# Altium PCB 1K5_Power_Factor_V0.PcbDoc (part 1 of 2)
Units mm, origin at the board's own origin, x right, y up, seen from the top; angles counter-clockwise.
Board outline 100 x 100.08 mm, 2 copper layers (Top Layer, Bottom Layer); 98 components, 49 nets, 261 pads, 152 vias.
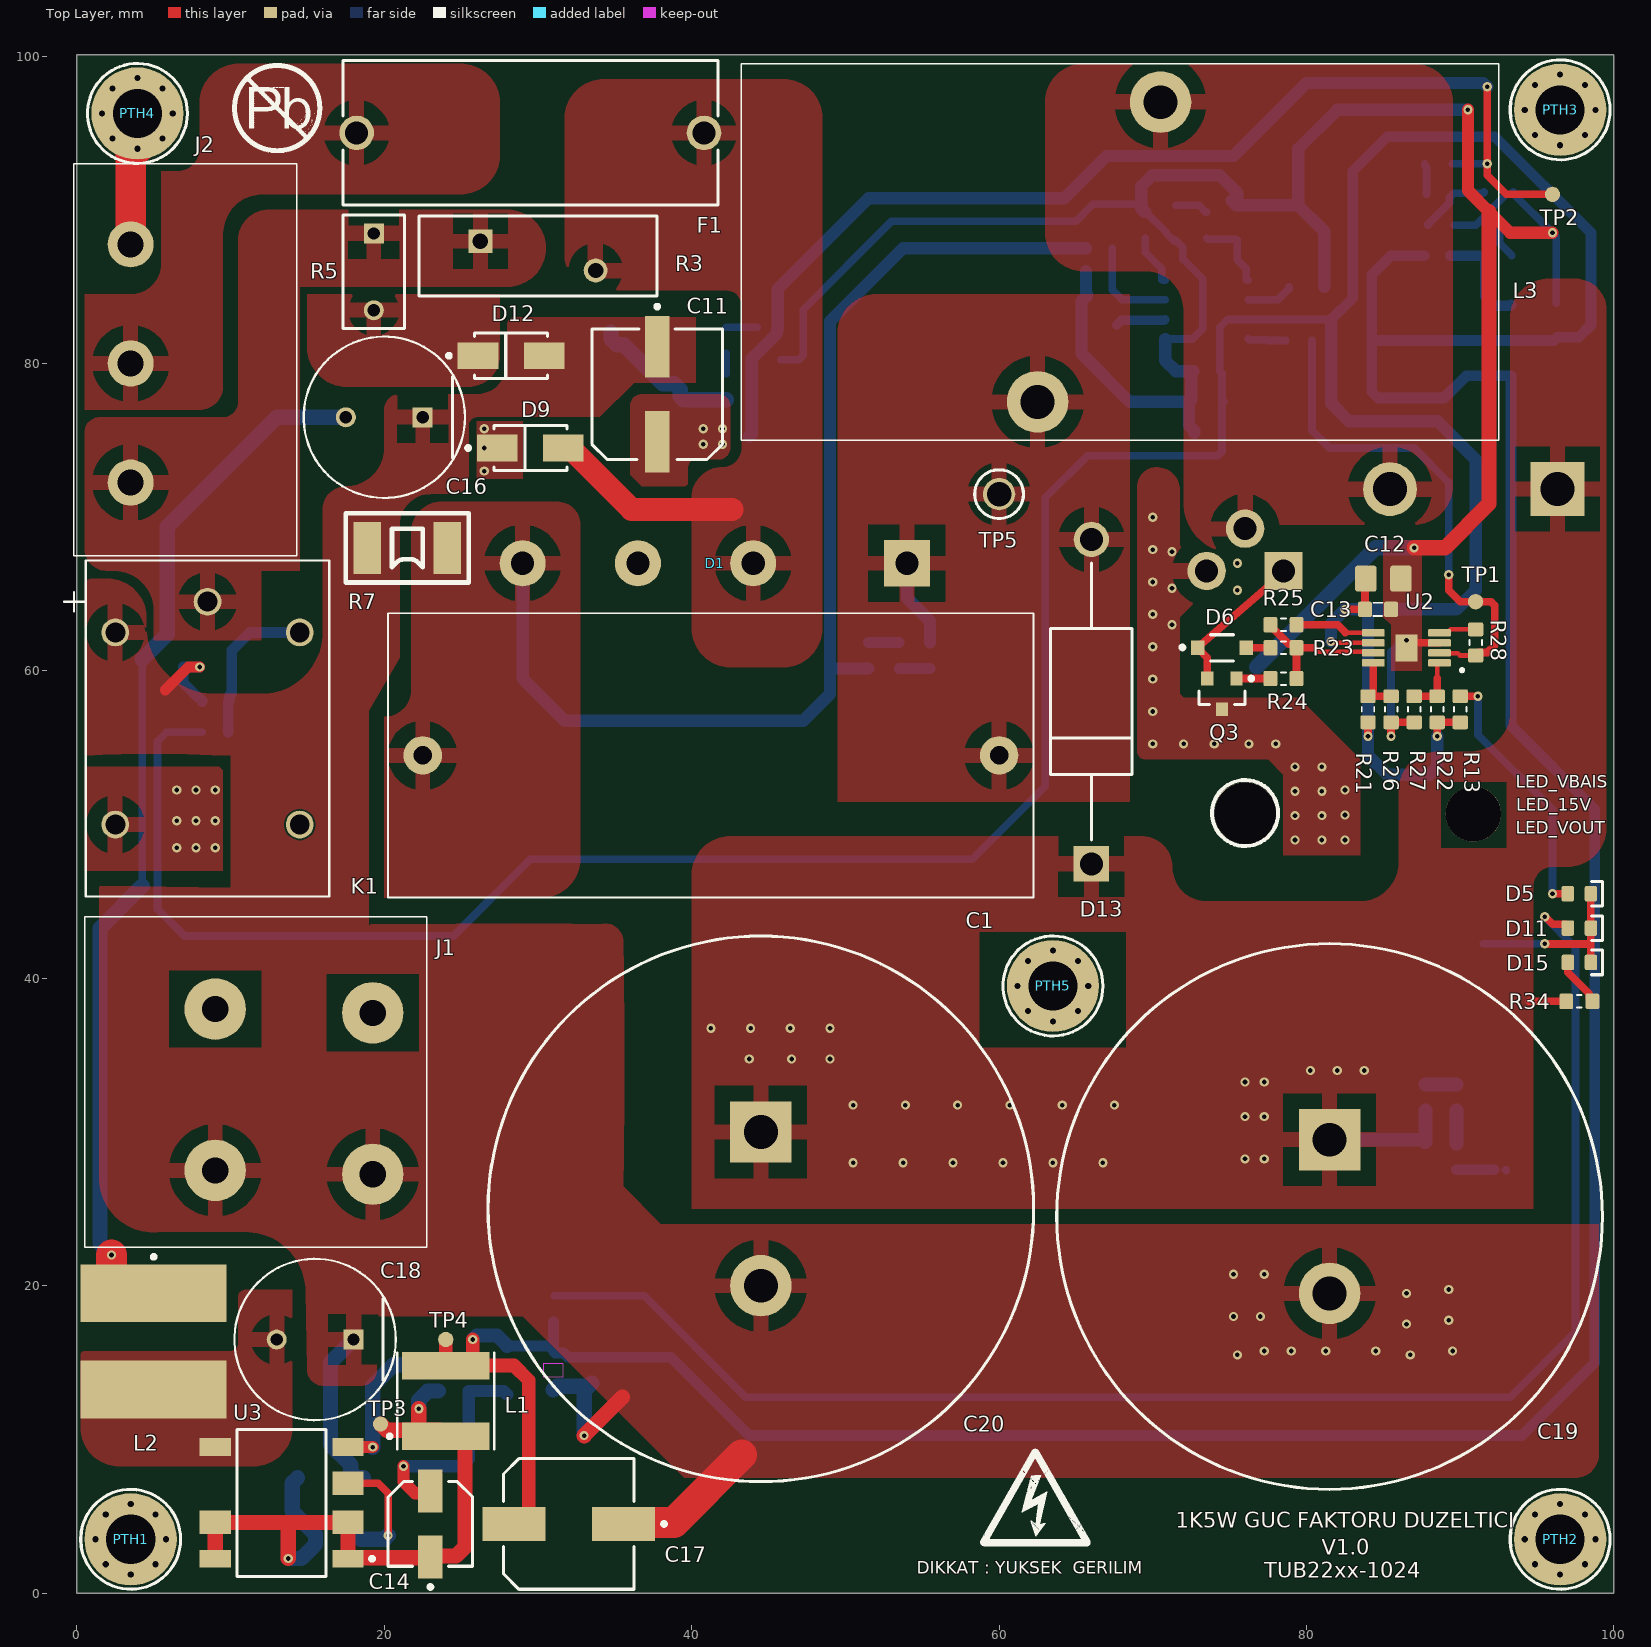
[diagram p0: Top Layer view]
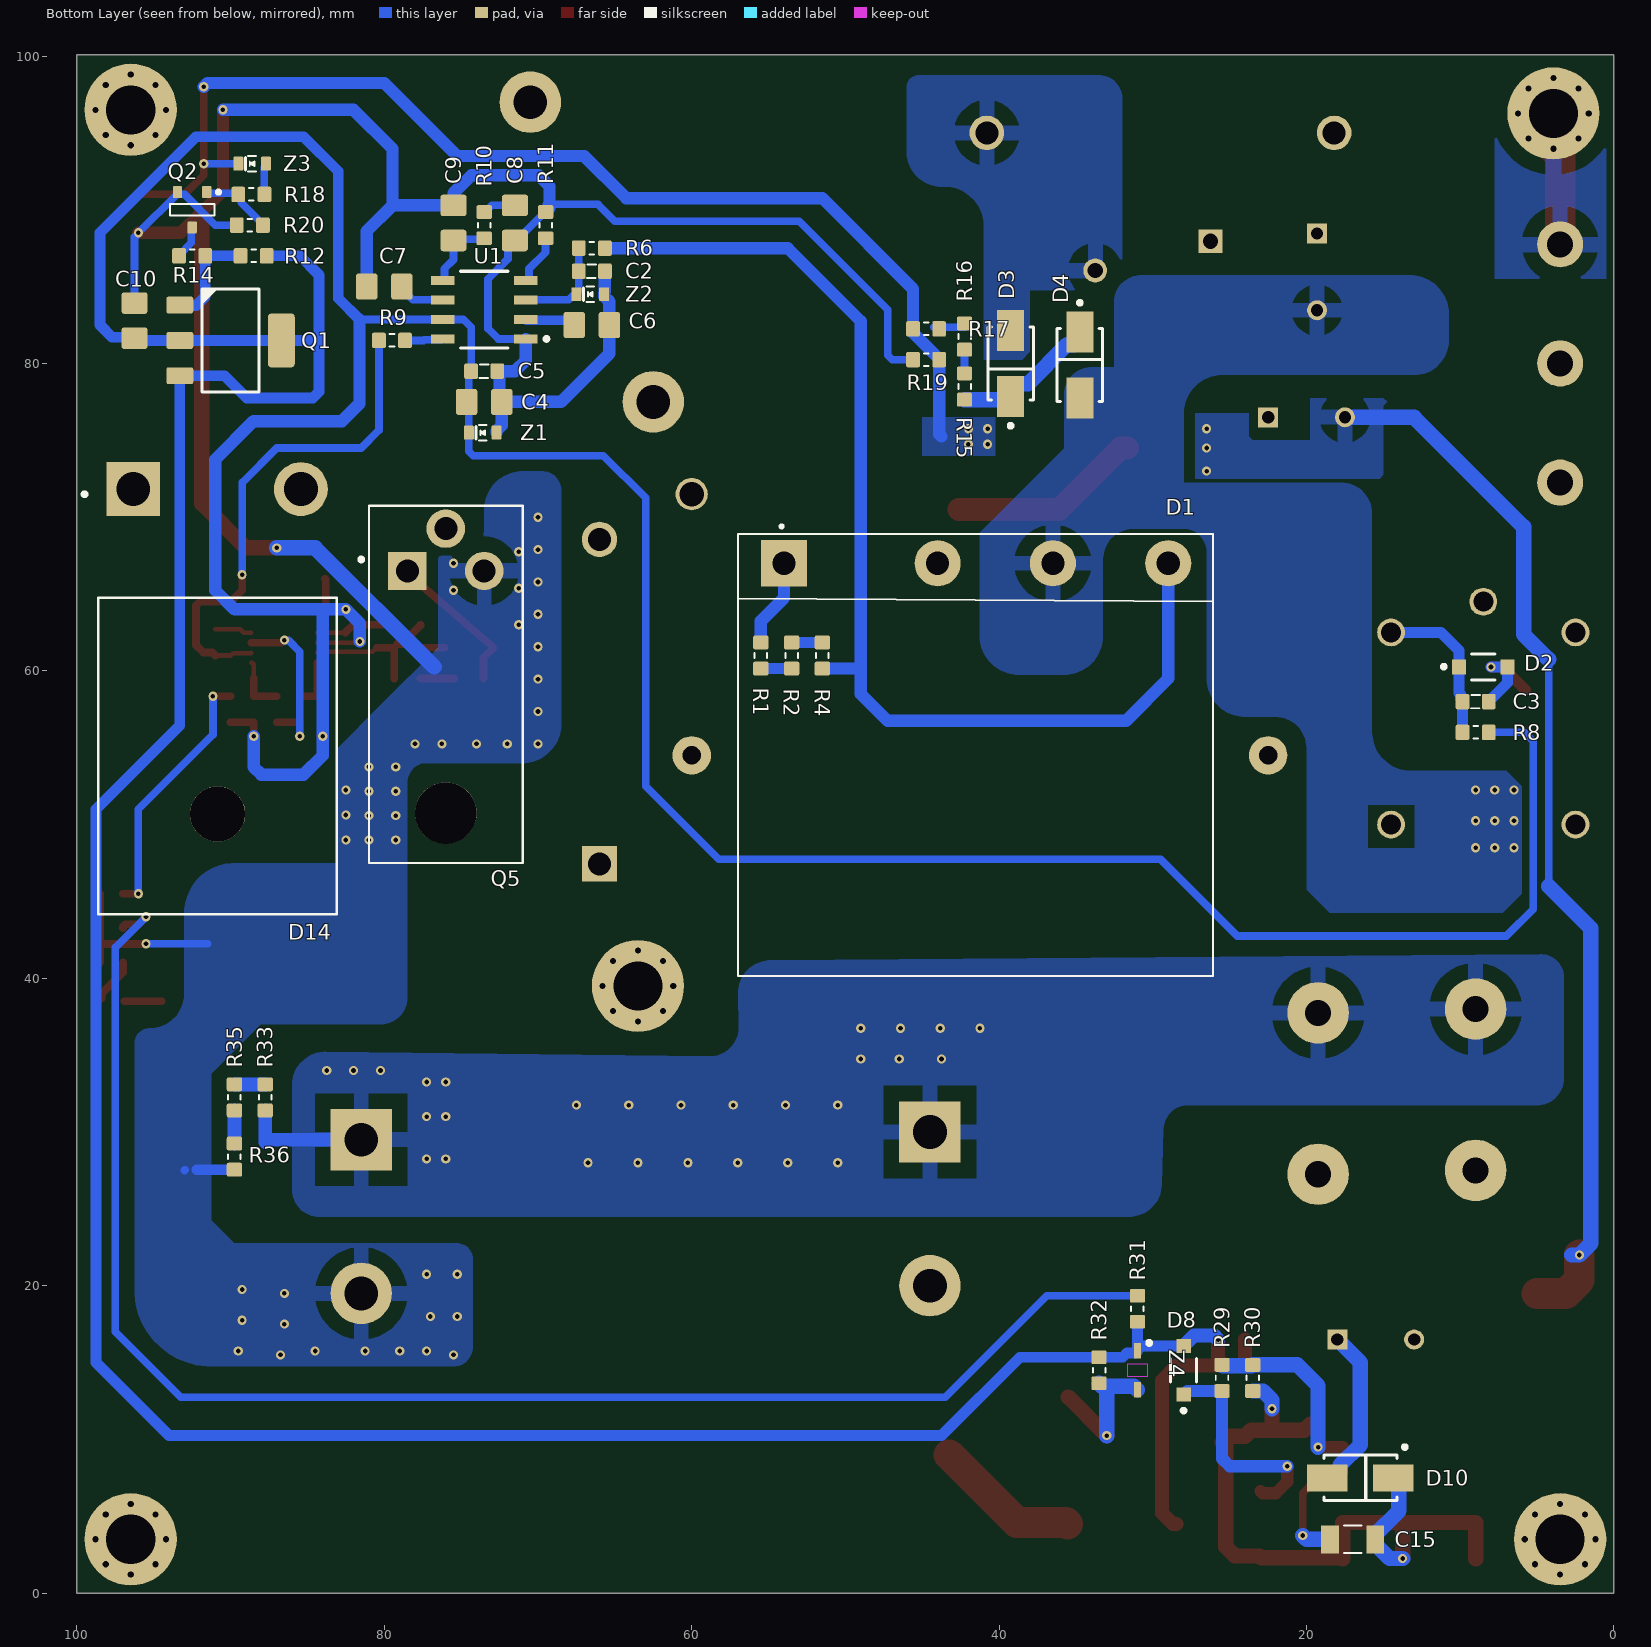
[diagram p1: Bottom Layer view, seen from below]
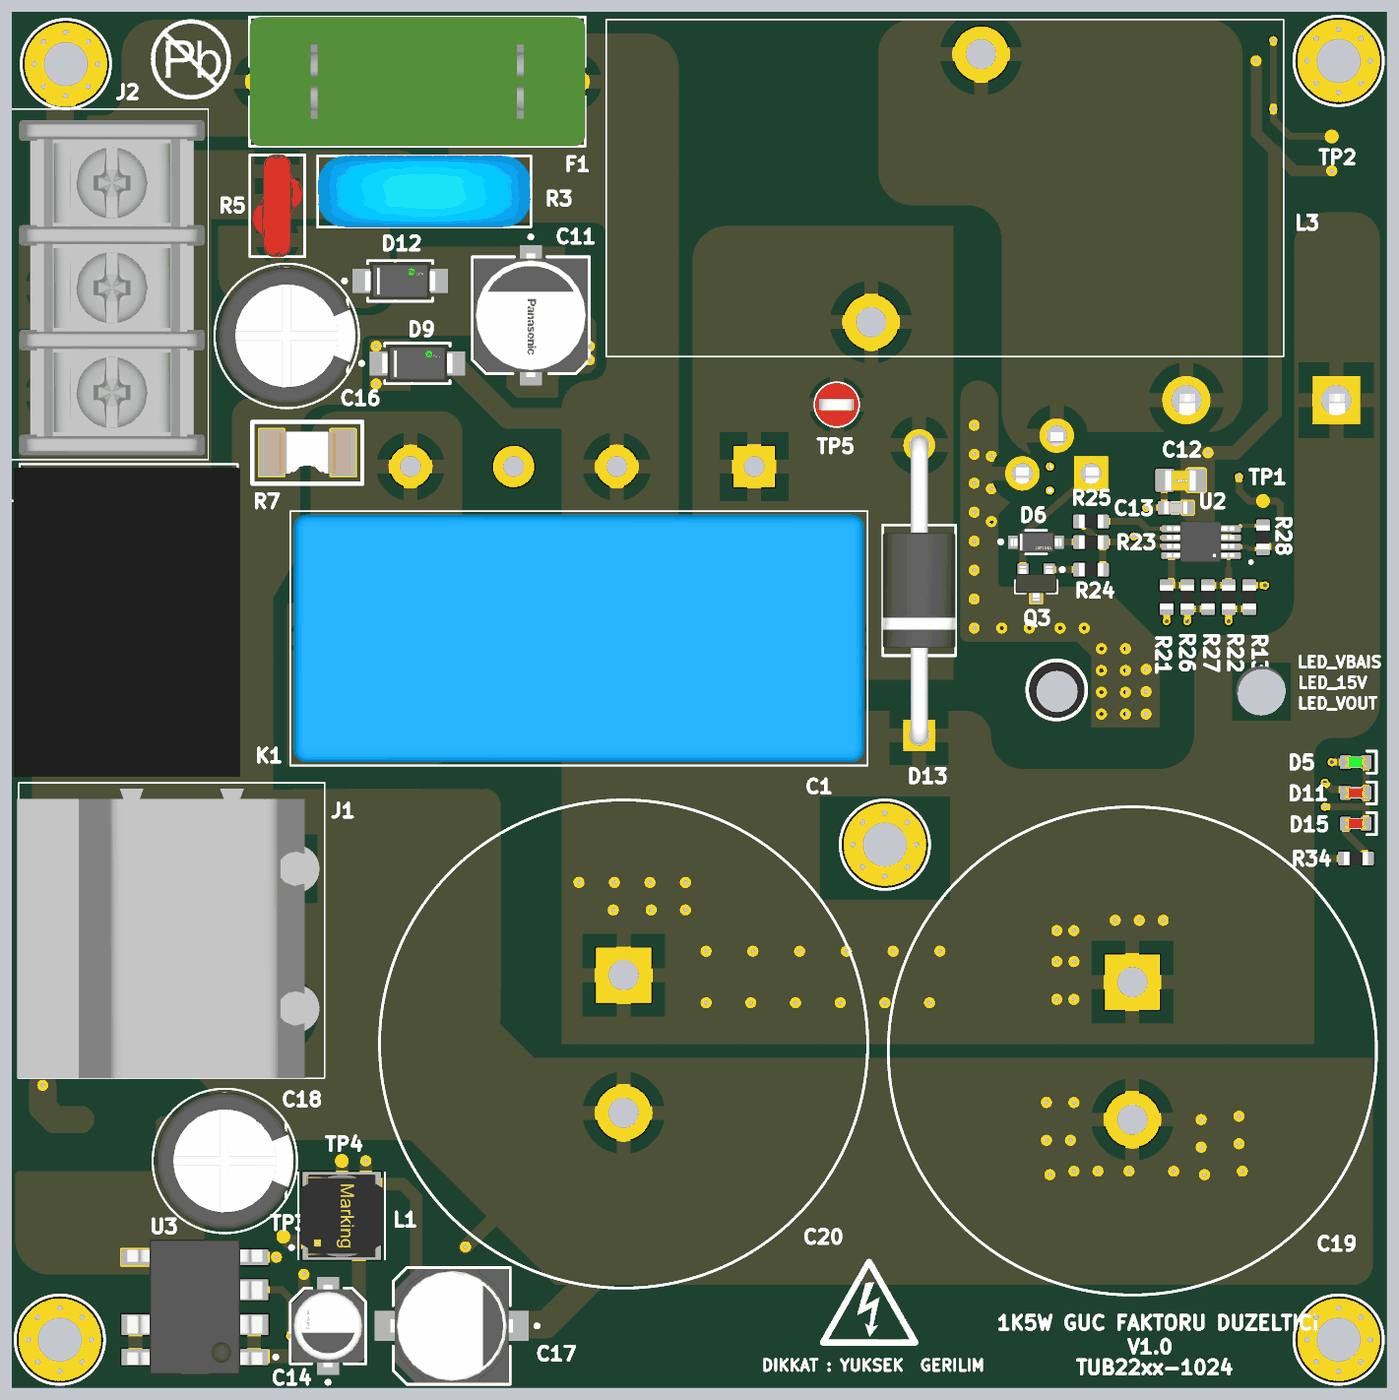
[diagram p3: 3D render of the assembled board from above, using the file's embedded part models]
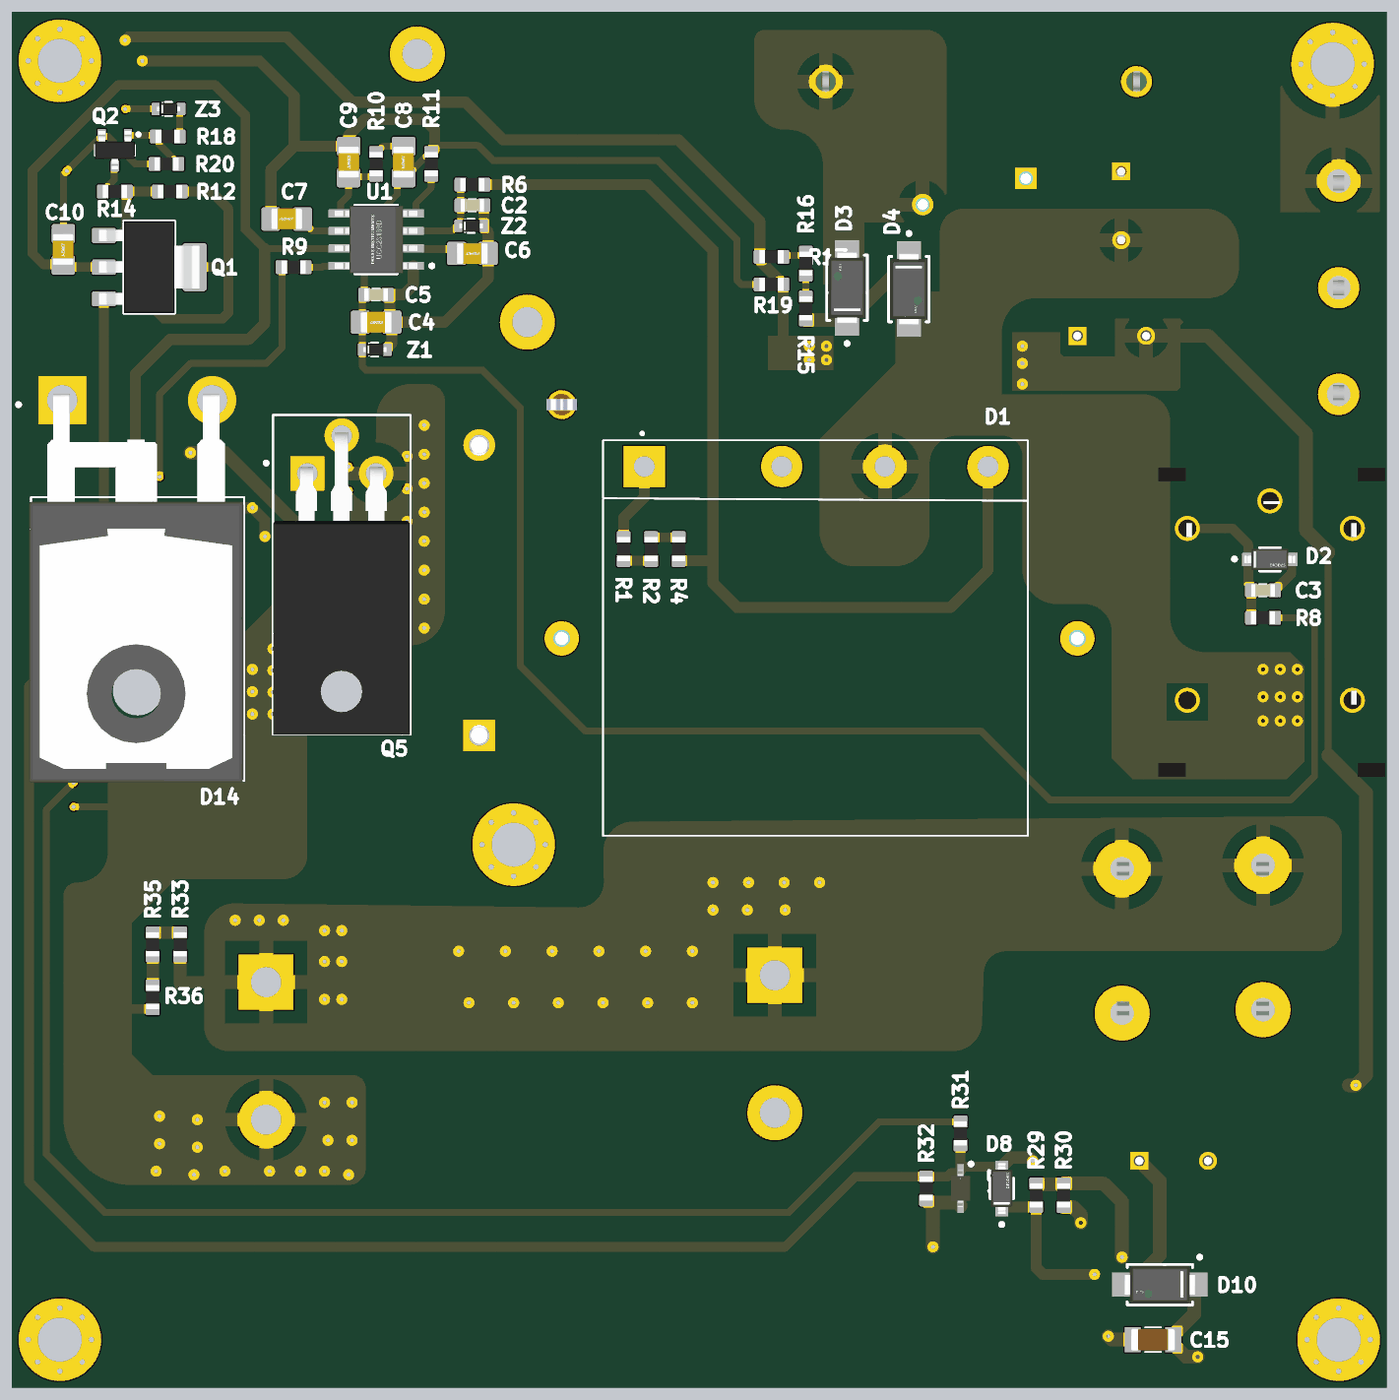
[diagram p4: 3D render of the assembled board from below, using the file's embedded part models]

## Layer stack, top to bottom
Top Solder: solder mask 0.0102, Solder Resist, Dk 3.5
Top Layer: signal copper 0.0356
Dielectric 1: dielectric 0.32, FR-4, Dk 4.8
Bottom Layer: signal copper 0.0356
Bottom Solder: solder mask 0.0102, Solder Resist, Dk 3.5

## Board outline
0,0 100,0 100,100.076 0,100.076

## Design rules (kind name [scope] priority, off if disabled: settings)
Clearance [All] p1: gap=0.1 ignorepadtopadclearanceinfootprint=FALSE
HoleSize [All] p1: absolutevalues=TRUE maxlimit=6 minlimit=0.15 maxpercent=80.000 minpercent=20.000
PolygonConnect [All] p1: thpad.connectstyle=Relief thpad.reliefconductorwidth=1 thpad.reliefentries=4 thpad.polygonreliefangle="90 Angle" thpad.airgapwidth=1 smdpad.connectstyle=Direct smdpad.reliefconductorwidth=0.254 smdpad.reliefentries=4 smdpad.polygonreliefangle="90 Angle" smdpad.airgapwidth=0.254 via.connectstyle=Direct via.reliefconductorwidth=0.254 via.reliefentries=4 via.polygonreliefangle="90 Angle" via.airgapwidth=0.254
RoutingVias [All] p1: holewidth=0.711 width=1.27 viastyle="Through Hole" minholewidth=0.711 minwidth=1.27 maxholewidth=0.711 maxwidth=1.27
SolderMaskExpansion [All] p1: expansion=0.102 istentingtop=FALSE
UnRoutedNet [All] p1: checkbadconnections=TRUE
Width [All] p1: maxlimit=2 minlimit=0.3 preferedwidth=0.3 minimp=50.000000 maximp=50.000000 favimp=50.000000
28 further rules are at their usual default settings.

## Classes and differential pairs
component class U_UCC27444_GateDrivers: C12 C13 D6 Q3 R21 R22 R23 R24 R25 R26 R27 R28 U2
component class U_SoftStart_Controll_Circuit: 33 C10 C11 D3 D4 D5 Q1 Q2 R12 R13 R14 R15 R16 R17 R18 R19 R20 TP2 Z3
component class U_Output_CONN: J1
component class U_AC_Input_Rectifier: C1 C2 C3 D1 D2 F1 J2 K1 R1 R2 R3 R4 R5 R6 R7 R8
component class U_UCC28180_PFC_Controller: C4 C5 C6 C7 C8 C9 R9 R10 R11 TP1 U1 Z1 Z2
component class U_PFC_PWR_BOOST_CNV: C19 C20 D13 D14 D15 L3 Q5 R33 R34 R35 R36 TP5
component class U_PFC_15V_PwrSRegulator: C14 C15 C16 C17 C18 D8 D9 D10 D11 D12 L1 L2 PTH1 PTH2 PTH3 PTH4 PTH5 R29 R30 R31 R32 TP3 TP4 U3 Z4

## Components (designator, comment, footprint, x,y, rotation, side; value= is the part's Value field where it differs from the comment)
C1 "B32026A3105M000" CAPRR3750W100L4150T1800H3250 41.25,54.5 r0 top locked value=1uF/630V
C2 "CL10B222KB8NNNC" CAPC1608N 66.5,86 r0 bottom value=2.2nF
C3 "CL10B104KB8NNNC" CAPC1608N 9,58 r0 bottom value=0.1uF
C4 "CL21A106KAYNNNE" CAP_0805 73.5,77.5 r0 bottom value=10uF
C5 "CL10B104KB8NNNC" CAPC1608N 73.5,79.5 r0 bottom value=0.1uF
C6 "CL10B332KB8NNNC" CAP_0805 66.5,82.5 r0 bottom value=3.3nF
C7 "CL10B102KB8NNNC" CAP_0805 80,85 r180 bottom value=1nF
C8 "CL21A106KAYNNNE" CAP_0805 71.5,89.143 r90 bottom value=10uF
C9 "CL10F334ZA8NNNC" CAP_0805 75.5,89.143 r270 bottom value=330nF
C10 "CL21A106KAYNNNE" CAP_0805 96.25,82.786 r90 bottom value=10uF
C11 "BXJ50VC33MF80TP" FP-FKE-MFG 37.75,78 r270 top value=33µF
C12 "CL21A106KAYNNNE" CAP_0805 85,66 r180 top value=10uF
C13 "CL10B104KB8NNNC" CAPC1608N 84.65,64 r180 top value=0.1uF
C14 "SC1V106M05005VR" FP-FKC-MFG 23,4.5 r90 top
C15 "C1206C104KARECAUTO" CAPC3216X140N 17,3.5 r180 bottom value=100nF
C16 "PKLH-400V4R7MG125-T/A5.0" FP-RAD-TH-D_10_0_5-L_12_5-MFG 20,76.5 r180 top
C17 "CKL025M101F10PKKKV00A" FP-SEV8X10_5-MFG 32,4.5 r180 top
C18 "PKLH-400V4R7MG125-T/A5.0" FP-RAD-TH-D_10_0_5-L_12_5-MFG 15.5,16.5 r180 top
C19 "ESMR451VSN821MA50S" CAPPRD1000W180D3550H5250 81.5,29.5 r270 top locked value=820uF/450V
C20 "ESMR451VSN821MA50S" CAPPRD1000W180D3550H5250 44.5,30 r270 top locked value=820uF/450V
D1 "GBJ2510-HT" DIOB_GBJ2510-F 41.5,66.15 r180 top
D2 "B0530W-7-F" FP-SOD123-MFG 8.5,60.25 r180 bottom value=170pF
D3 "RS1M" FP-403AE-MFG 39.25,80 r90 bottom value=10pF
D4 "RS1M" FP-403AE-MFG 34.75,79.9 r270 bottom value=10pF
D5 "LTST-C190TGKT" LED_0603_GREEN 97.75,45.5 r180 top
D6 "B0530W-7-F" FP-SOD123-MFG 74.5,61.5 r0 top value=170pF
D8 "1N4148W-13-F" FP-SOD123-MFG 28,14.5 r90 bottom value=2pF
D9 "RS1M" FP-403AE-MFG 29.5,74.5 r0 top value=10pF
D10 "RS1M" FP-403AE-MFG 16.5,7.5 r0 bottom value=10pF
D11 "19-21/R6C-AP1Q2/4T" LED_0603_RED 97.75,43.266 r180 top
D12 "RS1M" FP-403AE-MFG 28.25,80.5 r0 top value=10pF
D13 "1N5406" FP-1N5406-E3-54-MFG 66,58 r90 top locked
D14 "WNSC5D30650W6Q" WNSC5D30650W6Q 83,65 r0 bottom locked
D15 "19-21/R6C-AP1Q2/4T" LED_0603_RED 97.75,41.032 r180 top
F1 "696108003002" 696108003002 29.5,95 r0 top
J1 "DG136HT-10.16-02P-14-00A" DG136HT-02P 0.5,44 r270 top
J2 "DG25S-B-03P-13-00AH" DG28C-B-03P 3.292,103.75 r90 top
K1 "G5LE-1-E-DC12" G5LE-1-E-DC12 8.5,48 r0 top
L1 "FPI0503-102K" WE-LQS_6045 24,12.5 r270 top
L2 "FPI0705-102K(W0.15)" WE-PD2_1054 1275,-1253.625 r270 top
L3 "0077438A7" 0077438A7 92.5,75.25 r90 top locked value=280uH
PTH1 "PTH-M3D6X6" PH3.2 3.5,3.5 r0 top
PTH2 "PTH-M3D6X6" PH3.2 96.5,3.5 r0 top
PTH3 "PTH-M3D6X6" PH3.2 96.5,96.5 r0 top
PTH4 "PTH-M3D6X6" PH3.2 3.937,96.266 r0 top
PTH5 "PTH-M3D6X6" PH3.2 63.5,39.5 r0 top
Q1 "DMP6185SEQ-13" SOT223 90,81.5 r180 bottom
Q2 "2N7002K-T1-GE3" SOT23-3 92.5,90 r270 bottom
Q3 "MMBTA92-7-F" DIOD-SOT23-3_V 74.5,58.5 r270 top
Q5 "FCP190N65S3R0" MOSFET_T0220 74.25,56.5 r0 bottom locked
R1 "CRT03F7E6803" RESC1608N 55.5,61 r270 bottom value=680K
R2 "RC0603JR-07330KL" RESC1608N 53.5,61 r90 bottom value=330K
R3 "V385LA20AP" FP-B72214S0301K101-0 30,87 r0 top
R4 "RI0603L105JT" RESC1608N 51.5,61 r270 bottom value=1M
R5 "PPL19100HA1B7CKB" FP-PGTL_P5_D7_4_T4_H13_4-MFG 19.315,85.961 r270 top
R6 "0603SAF2200T5E" RESC1608N 66.5,87.5 r0 bottom value=220R
R7 "PE2512FKE7W0R018L" CSS2H-2512 21.5,68 r0 top value=18mR
R8 "CRT03J7E1200" RESC1608N 9,56 r0 bottom value=120R
R9 "CRT03J7E1200" RESC1608N 79.5,81.5 r0 bottom value=120R
R10 "RC0603JR-0710KL" RESC1608N 73.5,89 r90 bottom value=10K
R11 "0603SAF4752T5E" RESC1608N 69.5,89 r270 bottom value=47.5K
R12 "RC0603JR-0710KL" RESC1608N 88.5,87 r0 bottom value=10K
R13 "0603SAF4701T5E" RESC1608N 90,57.5 r90 top value=4.7K
R14 "0603SAF4701T5E" RESC1608N 92.5,87 r0 bottom value=4.7K
R15 "CRT03F7E6803" RESC1608N 42.25,78.5 r90 bottom value=680K
R16 "RI0603L105JT" RESC1608N 42.25,81.75 r90 bottom value=1M
R17 "RC0603JR-07330KL" RESC1608N 44.75,82.25 r180 bottom value=330K
R18 "CQ03SAF3301T5E" RESC1608N 88.65,91 r0 bottom value=3.3K
R19 "RC0603JR-07330KL" RESC1608N 44.75,80.25 r0 bottom value=330K
R20 "RC0603JR-0710KL" RESC1608N 88.75,89 r0 bottom value=10K
R21 "N.P" RESC1608N 84,57.5 r90 top
R22 "N.P" RESC1608N 88.5,57.5 r90 top
R23 "0603SAJ0100T5E" RESC1608N 78.5,61.5 r0 top value=10R
R24 "0603SAJ068JT5E" RESC1608N 78.5,59.5 r0 top value=6R8
R25 "N.P" RESC1608N 78.5,63 r0 top value=10R
R26 "N.P" RESC1608N 85.5,57.5 r270 top
R27 "N.P" RESC1608N 87,57.5 r270 top
R28 "N.P" RESC1608N 91,61.85 r270 top value=0R
R29 "0603SAF1622T5E" RESC1608N 25.5,14 r90 bottom value=16.2K
R30 "HP03W5F2001T5E" RESC1608N 23.5,14 r270 bottom value=2K
R31 "0603SAF4701T5E" RESC1608N 31,18.5 r90 bottom value=4.7K
R32 "HP03W5F2001T5E" RESC1608N 33.5,14.5 r270 bottom value=2K
R33 "0603SAJ0105TDE" RESC1608N 87.75,32.25 r90 bottom value=1M
R34 "0603SAJ0105TDE" RESC1608N 97.75,38.5 r0 top value=1M
R35 "0603SAJ0105TDE" RESC1608N 89.75,32.25 r270 bottom value=1M
R36 "CR-03FA7--12K7" RESC1608N 89.75,28.4 r270 bottom value=12.7K
TP1 "TP_NOBOM" PAD_RND_1MM 91,64.5 r90 top
TP2 "TP_NOBOM" PAD_RND_1MM 96,91 r90 top
TP3 "TP_NOBOM" PAD_RND_1MM 19.75,11 r90 top
TP4 "TP_NOBOM" PAD_RND_1MM 24,16.5 r0 top
TP5 "5010" KSTN-5010_V 60,71.5 r0 top
U1 "UCC28180D" FP-D0008A-MFG 73.5,83.5 r0 bottom
U2 "UCC27424DGNR" SOP65P490X110-9N 86.5,61.5 r180 top
U3 "LNK306GN-TL" PI-SMD-8B-7_V 13.318,5.868 r180 top
Z1 "MMSZ18V-HT" SOD523C 73.6,75.5 r180 bottom value=18V
Z2 "BZT52C5V1TQ-7-F" SOD523C 66.6,84.5 r180 bottom value=5.1V
Z3 "MMSZ18V-HT" SOD523C 88.6,93 r180 bottom value=18V
Z4 "MMSZ5248BS-7-F" ZDO_SOD323_DIO-M 31,14.5 r270 bottom

## Footprints (in the part's own frame and the unit in brackets; to place one, negate y for a bottom-side part, rotate by r counter-clockwise, add the part's x,y. Pads: shape width x height; smd on the part's side, far side on the other; paste and mask are expansions set on the pad)
0077438A7 [mm]
  round 4 hole 2.2: 1(2.25,30) 2(21.75,22)
  silkscreen extent -0.25,0 24.25,49.27
696108003002 [mm] "FUSEHOLDER BLOCKS - PCB - CLIP COVER - THT"
  round 2.25 hole 1.5: 1(-11.3,0) 2(11.3,0)
  silkscreen extent -12.2,-4.7 12.2,4.7, body extent -12.2,-4.7 12.2,4.7, height 11.55
CAP_0805 [mm]
  rrect25% 1.4x1.7 smd: 1(-1.143,0) 2(1.143,0)
  body extent -1.15,-0.76 1.15,0.79, height 1.01
CAPC1608N [mm] "Chip Capacitor, Body 1.6x0.8mm, 0603, IPC Medium Density"
  round 0.254 on Mech14: 0(0,0)
  rrect25% 0.9x1 smd: 1(-0.85,0) 2(0.85,0)
  silkscreen extent -0.28,-0.43 0.3,0.43, body extent -0.85,-0.45 0.85,0.45, height 0.89
CAPC3216X140N [mm]
  rect 1.16x1.82 smd paste+0 mask+0.102: 1(-1.475,0) 2(1.475,0)
  silkscreen extent -0.57,-0.9 0.57,0.9, body extent -1.6,-0.8 1.6,0.8, height 1.4
CAPPRD1000W180D3550H5250 [mm]
  rect 4x4 hole 2.2: 1(0,0)
  round 4 hole 2.2: 2(10,0)
  silkscreen extent -12.75,-17.75 22.75,17.75, body extent -12.67,-17.5 22.3,17.5, height 50
CAPRR3750W100L4150T1800H3250 [mm]
  round 2.5 hole 1.2: 1(-18.75,0) 2(18.75,0)
  silkscreen extent -21,-9.25 21,9.25, body extent -20.75,-9 20.75,9, height 32.7
CSS2H-2512 [mm]
  rect 1.8x3.4 smd: 1(-2.6,0) 2(2.6,0)
  silkscreen extent -4,-2.25 4,2.25, body extent -3.17,-1.52 3.18,1.52, height 0.84
DG28C-B-03P [mm]
  round 3 hole 1.7: 1(-31.5,-0.208) 2(-23.75,-0.208) 3(-16,-0.208)
  silkscreen extent -36.25,-11 -10.75,3.5, body extent -35.93,-10.75 -11.57,2.75, height 14.8
DG136HT-02P [mm]
  round 4 hole 1.7: 1(6,8.5) 1(6.25,18.75) 2(16.5,8.5) 2(16.75,18.75)
  silkscreen extent 0,0 21.5,22.25, body extent 0.43,-0.11 21.5,21.89, height 30.8
DIOB_GBJ2510-F [mm]
  rect 3x3 hole 1.51: 1(-12.5,-0.85)
  round 3 hole 1.51: 2(-2.5,-0.85) 3(5,-0.85) 4(12.5,-0.85)
DIOD-SOT23-3_V [mm] "SOT23, 3-Leads, Body 3x1.4mm, Pitch 0.95mm"
  rect 0.9x0.8 smd: 1(-1,0.95) 2(-1,-0.95) 3(1,0)
  silkscreen extent -1.12,-1.5 0.7,2.03, body extent -1.25,-1.5 1.25,1.5, height 1.1
FP-1N5406-E3-54-MFG [mm]
  rect 2.3x2.3 hole 1.5 paste-1000 mask+0: 1(-10.558,0)
  round 2.3 hole 1.5 paste-1000 mask+0: 2(10.558,0)
  silkscreen extent -9.01,-2.65 9.01,2.65, body extent -11.81,-2.75 11.81,2.75, height 0.25
FP-403AE-MFG [mm]
  rect 2.65x1.75 smd paste+0 mask+0: 1(-2.15,0) 2(2.15,0)
  silkscreen extent -4.17,-1.48 2.37,1.48, body extent -2.6,-1.36 2.6,1.36, height 2.5
FP-B72214S0301K101-0 [mm]
  rect 1.55x1.55 hole 1 paste-1000 mask+0: 1(-3.75,0.95)
  round 1.55 hole 1 paste-1000 mask+0: 2(3.75,-0.95)
  silkscreen extent -7.75,-2.6 7.75,2.6, body extent -7.85,-2.7 7.85,2.7, height 0.25
FP-D0008A-MFG [mm]
  rrect17% 1.55x0.6 smd paste+0 mask+0: 1(-2.7,1.905) 2(-2.7,0.635) 3(-2.7,-0.635) 4(-2.7,-1.905) 5(2.7,-1.905) 6(2.7,-0.635) 7(2.7,0.635) 8(2.7,1.905)
  silkscreen extent -4.17,-2.5 1.55,2.5, body extent -3,-2.45 3,2.45, height 1.75
FP-FKC-MFG [mm]
  rect 2.8x1.6 smd paste+0 mask+0: 1(-2.15,0) 2(2.15,0)
  silkscreen extent -4.22,-2.75 2.75,2.75, body extent -3.8,-3 3.8,3, height 0.25
FP-FKE-MFG [mm]
  rect 4x1.6 smd paste+0 mask+0: 1(-3.1,0) 2(3.1,0)
  silkscreen extent -5.82,-4.25 4.25,4.25, body extent -4.5,-4.15 4.5,4.15, height 6.5
FP-PGTL_P5_D7_4_T4_H13_4-MFG [mm]
  rect 1.3x1.3 hole 0.8 paste-1000 mask+0: 1(-2.5,0)
  round 1.3 hole 0.8 paste-1000 mask+0: 2(2.5,0)
  silkscreen extent -3.7,-2 3.7,2, body extent -3.8,-2.1 3.8,2.1, height 0.25
FP-RAD-TH-D_10_0_5-L_12_5-MFG [mm]
  rect 1.3x1.3 hole 0.8 paste-1000 mask+0: 1(-2.5,0)
  round 1.3 hole 0.8 paste-1000 mask+0: 2(2.5,0)
  silkscreen extent -5.25,-5.25 5.25,5.25, body extent -5.35,-5.35 5.35,5.35, height 0.25
FP-SEV8X10_5-MFG [mm]
  rect 4.1x2.2 smd paste+0 mask+0: 1(-3.55,0) 2(3.55,0)
  silkscreen extent -6.33,-4.25 4.25,4.25, body extent -5.85,-4.5 5.85,4.5, height 0.25
FP-SOD123-MFG [mm]
  rect 0.9x0.95 smd paste+0 mask+0: 1(-1.575,0) 2(1.575,0)
  silkscreen extent -2.7,-0.85 0.75,0.85, body extent -1.85,-0.77 1.85,0.77, height 1.45
G5LE-1-E-DC12 [mm]
  round 1.808 / inner round 1.524 / far side round 1.808 hole 1.3 paste-0.904 mask+0: 1(0,16.5) 2(-6,14.5) 3(-6,2) 4(6,2) 5(6,14.5)
  silkscreen extent -9.32,-2.68 7.93,19.18, body extent -8.38,-3.57 8.12,18.93, height 18.51
KSTN-5010_V [mm] "Test Point, Dia 3.17mm"
  round 2.1 hole 1.6: 1(0,0)
  silkscreen extent -1.59,-1.58 1.59,1.58, body extent -1.59,-1.59 1.59,1.59, height 8.13
LED_0603_GREEN [mm]
  rrect25% 0.8x1 smd: A(0.75,0) K(-0.75,0)
  silkscreen extent -1.5,-0.8 -0.8,0.8, body extent -0.8,-0.4 0.8,0.4, height 0.6
LED_0603_RED [mm]
  rrect25% 0.8x1 smd: A(0.75,0) K(-0.75,0)
  silkscreen extent -1.5,-0.8 -0.8,0.8, body extent -0.8,-0.4 0.8,0.4, height 0.6
MOSFET_T0220 [mm]
  rrect4% 2.5x2.5 hole 1.5 paste+0 mask+0: 1(4.25,-10)
  round 2.5 hole 1.5 paste+0 mask+0: 2(1.75,-12.75) 3(-0.75,-10)
  round 4 hole 4 unplated paste+0 mask+0: ""(1.75,5.75)
  silkscreen extent -3.25,-14.25 7.38,9, body extent -3.21,-13.01 6.75,9.01, height 4.58
PAD_RND_1MM [mm]
  round 1 smd paste-0.5 mask+0: 1(0,0)
PH3.2 [mm]
  round 6 hole 3.2: 1(0,0)
  silkscreen extent -3.25,-3.25 3.25,3.25
PI-SMD-8B-7_V [mil] "SMD, 7-Leads, Body 9.575x6.35mm"
  rect 80x46 smd: 1(-170,143) 4(-170,-143) 5(170,-143) 8(170,143)
  rect 80x60 smd: 2(-170,50) 3(-170,-50) 7(170,50)
  silkscreen extent -237,-188 114,188, body extent -193,-194 193,194, height 157
RESC1608N [mm]
  round 0.254 on Mech14: 0(0,0)
  rrect25% 0.9x1 smd: 1(-0.85,0) 2(0.85,0)
  silkscreen extent -0.15,-0.41 0.15,0.41, body extent -0.87,-0.47 0.88,0.48, height 0.54
SOD523C [mm] "SOD-523F; 2 Leads; Body 1.3 x 0.9 mm, (LxW)"
  round 0.508 on Mech14: 0(0,0)
  rrect20% 0.65x0.9 smd: 1(0.9,0) 2(-0.9,0)
  silkscreen extent -0.43,-0.51 0.25,0.51, body extent -0.85,-0.45 0.85,0.45, height 0.7
SOP65P490X110-9N [mm]
  rrect25% 1.47x0.48 smd: 1(-2.15,0.975) 2(-2.15,0.325) 3(-2.15,-0.325) 4(-2.15,-0.975) 5(2.15,-0.975) 6(2.15,-0.325) 7(2.15,0.325) 8(2.15,0.975)
  rect 1.425x1.76 smd paste-2: 9(0,0)
  silkscreen extent -3.72,1.36 -3.52,1.55, body extent -2.41,-1.52 2.49,1.48, height 1.1
SOT23-3 [mm] "SOT23, 3 pin"
  round 0.5 on Mech14: 0(0,0)
  rrect25% 0.8x0.6 smd: 1(-1.15,0.95) 2(-1.15,-0.95) 3(1.15,0)
  silkscreen extent -1.25,-1.45 0.38,1.81, body extent -1.4,-1.45 1.4,1.45, height 1.29
SOT223 [mm] "SOT223 /SC-73"
  round 1 on Mech14: 0(0,0)
  rrect25% 1.75x1.1 smd: 1(-3.3,2.3) 2(-3.3,0) 3(-3.3,-2.3)
  rrect25% 1.75x3.5 smd: 4(3.3,0)
  silkscreen extent -1.85,-3.35 1.85,3.35, body extent -3.65,-3.35 3.65,3.35, height 1.8
WE-LQS_6045 [mm] "SMD Power Inductor, 2-Leads, body 6x6mm"
  rect 1.8x5.7 smd: 1(2.3,0) 2(-2.3,0)
  silkscreen extent -3.15,-3.77 3.15,3.15, body extent -3,-3 3,3, height 4.52
WE-PD2_1054 [mm] "SMD Power Inductor, 2-Leads, body 10x9mm"
  rect 3.75x9.5 smd: 1(-1273.125,-1270) 2(-1266.875,-1270)
  silkscreen extent -1275.62,-1270.12 -1275.38,-1269.87, body extent -1275.04,-1274.5 -1264.96,-1265.5, height 5.43
WNSC5D30650W6Q [mm] "DIODE SIL.CARB.SCHOTTKY 30A 650V TO247F-2L THT"
  rect 3.5x3.5 hole 2.2 paste+0 mask+0: 1(13.327,-6.825)
  round 3.5 hole 2.2 paste+0 mask+0: 2(2.427,-6.825)
  round 3.6 hole 3.6 unplated paste+0 mask+0: ""(7.85,14.31)
  silkscreen extent 0.1,-6.62 16.62,20.83, body extent 0.15,-7.28 15.75,21, height 5.1
ZDO_SOD323_DIO-M [mm]
  rect 1x0.45 smd paste+0 mask+0: 1(-1.27,0) 2(1.27,0)
  Keep-Out Layer region: -0.432,-0.648 -0.432,0.648 0.432,0.648 0.432,-0.648
  silkscreen extent -1.9,0.64 -1.65,0.89, body extent -1.35,-0.7 1.35,0.7, height 1.09

## Part data
C1: "CAP, 1ÂµF, 20%, PP; Capacitance: 1ÂµF; Suppression Class: Y2; Product Range: B32026 Series; Voltage Rating X: -; Voltage Rating Y: 300V; Capacitor Dielectric Type: PP (Polypropylene); Capacitance Tolerance: Â± 20%; dv/dt Rating: 30", Package=None, Check_prices=https://www.snapeda.com/parts/B32026A3105M000/TDK/view-part/?ref=eda, MF="TDK Electronics", MP=B32026A3105M000, SnapEDA_Link=https://www.snapeda.com/parts/B32026A3105M000/TDK/view-part/?ref=snap
C2: library part CAP_0805, "MLCC (1608) 0603 2.2nF 50VDC ±10% X7R", Rating=50V
C3 C5 C13: library part CAP_0805, "MLCC (1608) 0603 100nF 50VDC ±10% X7R", Rating=50V
C4 C8 C12: library part CAP_0805, "MLCC (2012) 0805 10uF 25VDC ±10% X5R", LCSC=X7R, manufacturer=YAGEO, Manufacturer Part Number=CC0805KKX7R9BB105, Rating=50V, Distributor Link=https://www.digikey.com/en/products/detail/yageo/CC0805KKX7R9BB105/5195292
C6: library part CAP_0805, "MLCC (1608) 0603 3.3nF 50VDC ±10% X7R", LCSC=X7R, manufacturer=YAGEO, Manufacturer Part Number=CC0805KKX7R9BB105, Rating=50V, Distributor Link=https://www.digikey.com/en/products/detail/yageo/CC0805KKX7R9BB105/5195292
C7: library part CAP_0805, "MLCC (1608) 0603 1nF 50VDC ±10% X7R", LCSC=X7R, manufacturer=YAGEO, Manufacturer Part Number=CC0805KKX7R9BB105, Rating=50V, Distributor Link=https://www.digikey.com/en/products/detail/yageo/CC0805KKX7R9BB105/5195292
C9: library part CAP_0805, "MLCC (1608) 0603 330nF 25VDC -20% +80% Y5V", LCSC=X7R, manufacturer=YAGEO, Manufacturer Part Number=CC0805KKX7R9BB105, Rating=50V, Distributor Link=https://www.digikey.com/en/products/detail/yageo/CC0805KKX7R9BB105/5195292
C10: library part CAP_0805, "MLCC (2012) 0805 10uF 25VDC ±10% X5R"
C11: library part CMP-00287-05444366-1, "Aluminum Electrolytic Capacitor, 33 uF, 50 V, ± 20%, 2000 hours @ 105°C, Radial Can - SMD", Case/Package=Radial, Dielectric Material=Aluminium, ESR (Equivalent Series Resistance)=680mΩ, Leakage Current=16.5µA, Max Operating Temperature=105°C, Min Operating Temperature=-55°C, Ripple Current=195mA, Tolerance=20%, Voltage=50V, Contact Plating=Tin, Diameter=8mm, Height=6.2mm, Height - Seated (Max)=6.1976mm, Lead Diameter=650µm, Lead Free="Lead Free", Lead Pitch=2.2mm, Length=6.2mm, Life (Hours)=2000hours, Lifecycle Status=Production, Material=Aluminium, Mount="PCB, Surface Mount", NexarPartId=5444366, Number of Pins=2, packaging="Cut Tape", Radiation Hardening=No, REACH SVHC="No SVHC", Ripple Current (AC)=195mA, RoHS=Compliant, Schedule B="8532220020, 8532220020", Termination=SMD/SMT, Voltage Rating=50V, Voltage Rating (AC)=50V, Voltage Rating (DC)=50V, Width=8.3mm, Impedance=680mΩ
C14: library part CMP-05427-000030-1, "CAP.EL.10uF 35V 5x5.3 85C SMD SAMWHA", Capacitance=10uF, Case/Package=Radial, Dielectric Material=Aluminium, ESR (Equivalent Series Resistance)=1.52R, Leakage Current=3uA, Max Operating Temperature=105°C, Min Operating Temperature=-55°C, Package Quantity=1000, Ripple Current=85mA, Ripple Current (AC)=32mA, Tolerance=20%, Voltage=35V, Voltage Rating (DC)=50V, Construction=Cylindrical, Contact Plating=Tin, Diameter=5mm, Height=5.8mm, Height - Seated (Max)=0.228inch, Lead Free="Lead Free", Length=5.8mm, Life (Hours)=2000Hour, Material=Aluminium, Mount="Surface Mount", Number of Pins=2, packaging="Tape and Reel", Radiation Hardening=No, REACH SVHC="No SVHC", RoHS Compliant=Yes, series=FK, Termination=SMD/SMT, Voltage Rating=35V, Width=6.5mm, Impedance=1.52R
C15: "0.1 ÂµF Â±10% 250V Ceramic Capacitor X7R 1206 (3216 Metric)", Package="3216 KEMET", Check_prices=https://www.snapeda.com/parts/C1206C104KARECAUTO/Kemet/view-part/?ref=eda, MF=KEMET, MP=C1206C104KARECAUTO, SnapEDA_Link=https://www.snapeda.com/parts/C1206C104KARECAUTO/Kemet/view-part/?ref=snap
C16 C18: library part CMP-05427-001671-1, "CAP.EL.4u7 400V 10X12.5 5MM %20 105C LOW IMP", Capacitance=4.7uF, Case/Package=Radial, Max Operating Temperature=85°C, Min Operating Temperature=-25°C, Package Quantity=200, Ripple Current=65mA, Tolerance=20%, Voltage Rating=350V, Construction=RADIAL, Diameter=10mm, Dissipation Factor=0.2%, Height=12.5mm, Height - Seated (Max)=0.531inch, Lead Diameter=0.6mm, Lead Pitch=5mm, Lead/Base Style=Straight, Length=12.5mm, Life (Hours)=2000Hour, Mount="Through Hole", packaging=Bulk, Polarity=Polar, Radiation Hardening=No, REACH SVHC="No SVHC", Ripple Current (AC)=65mA, RoHS Compliant=Yes, series=M, Termination=Radial, Voltage Rating (DC)=350V
C17: library part CMP-35376-000024-1, "CAP.EL.100uF 25V 8x10 105C 5000H AEC-Q200 SMT", Capacitance=100uF, Case/Package=Radial, Max Operating Temperature=85°C, Min Operating Temperature=-40°C, Package Quantity=1, Ratings=AEC-Q200, Ripple Current=240mA, Tolerance=20%, Voltage Rating=25V, Construction=Cylindrical, Height - Seated (Max)=0.413inch, Lead Free="Lead Free", Lead Pitch=3.1mm, Life (Hours)=2000Hour, Mount="Surface Mount", packaging="Tape and Reel", Polarity=Polar, Radiation Hardening=No, RoHS Compliant=Yes, series=SEV
C19 C20: "Aluminum Electrolytic Capacitors - Snap In 450V 820uF 20% Tol.", Manufacturer_Name=Chemi-Con, Mouser Part Number=661-ESMR451N821MA50S, Datasheet Link=https://www.chemi-con.co.jp/products/relatedfiles/capacitor/catalog/SMRN-e.PDF, Geometry.Height=52.5mm, Manufacturer_Part_Number=ESMR451VSN821MA50S, Mouser Price/Stock=https://www.mouser.co.uk/ProductDetail/United-Chemi-Con/ESMR451VSN821MA50S/?qs=Odivq8ja527O2dyonXL23g%3D%3D
D1: "DIODE BRIDGE 25A 1000V", Package="SIP-4 Micro Commercial", Availability=Warning, Check_prices=https://www.snapeda.com/parts/GBJ3510-BP/Micro%20Commercial/view-part/52240/?ref=eda, MF="Micro Commercial", MP=GBJ3510-BP, Price=None, Purchase-URL=https://pricing.snapeda.com/search/part/GBJ3510-BP/?ref=eda, SnapEDA_Link=https://www.snapeda.com/parts/GBJ3510-BP/Micro%20Commercial/view-part/52240/?ref=snap
D2 D6: library part CMP-2000-05879-2, "DIODE SCHOTTKY 30V 500MA SOD123", Capacitance=170pF, Forward Current=0.5A, manufacturer="Diodes Inc.", Max Junction Temp=+125°C, Max Repetitive Reverse Voltage=30V, Max Surge Forward Current=5.5A, Package=SOD123, Peak Reverse Current=130uA, Temperature="-65°C to +125°C", Temperature Range Low=-65°C, Automotive=No, Category=Diode, componentlink2description=Datasheet, componentlink2url=https://www.diodes.com/assets/Datasheets/ds30139.pdf, Device Class L1="Discrete Semiconductors", Device Class L2=Diodes, Device Class L3="Schottky Diodes", Digikey Description="DIODE SCHOTTKY 30V 500MA SOD123", Footprint Url=https://www.diodes.com/assets/Package-Files/SOD123.pdf, Height=1.45mm, Lead Free=Yes, Manufacturer Part Number=B0530W-7-F, Mouser Description="Schottky Diodes & Rectifiers 30V 410mW", Octopart=https://octopart.com/b0530w-7-f-diodes+inc.-325721, Reverse Voltage=30V, RoHS=TRUE, Standoff Height=0mm, Temperature Range High=+125°C, Ipc Land Pattern Name=SOD365155X123-2
D3 D4 D9 D10 D12: library part CMP-07163-000022-1, "DIODE GEN PURP 1KV 1A SMA", Capacitance=10pF, Forward Current=1A, manufacturer="ON Semiconductor", Max Junction Temp=+150°C, Max Repetitive Reverse Voltage=1000V, Max Surge Forward Current=30A, Package=403AE, Peak Reverse Current=5uA, Temperature="-55°C to +150°C", Temperature Range Low=-55°C, Automotive=No, Category=Diode, componentlink2description=Datasheet, componentlink2url=https://www.onsemi.com/pub/Collateral/RS1M-D.PDF, Device Class L1="Discrete Semiconductors", Device Class L2=Diodes, Device Class L3="Rectifier Diodes", Digikey Description="DIODE GEN PURP 1KV 1A SMA", Footprint Url=https://www.onsemi.com/pub/Collateral/403AE.PDF, Height=2.5mm, Lead Free=Yes, Manufacturer Part Number=RS1M, Mouser Description="On a Reel of 7500, ON Semi 1000V 1A, Diode, 2-Pin DO-214AC RS1M", Octopart=https://octopart.com/rs1m-on+semiconductor-84331238, RoHS=TRUE, Standoff Height=0.05mm, Temperature Range High=+150°C
D5: library part LED_0603_GREEN, "LED SMD 0603 GREEN 71-450mcd 130° WATER CLEAR"
D8: library part CMP-12791-000005-1, "DIODE GEN PURP 100V 150MA SOD123", Capacitance=2pF, Forward Current=300mA, manufacturer="Diodes Inc.", Max Junction Temp=+150°C, Max Repetitive Reverse Voltage=100V, Max Surge Forward Current=1A, Package=SOD123, Peak Reverse Current=1uA, Temperature="-65°C to +150°C", Temperature Range Low=-65°C, Automotive=No, Category=Diode, componentlink2description=Datasheet, componentlink2url=https://upverter.com/datasheet/628e7d6fee5901eee6eef4567d1c3569f2cd3cde.pdf, Device Class L1="Discrete Semiconductors", Device Class L2=Diodes, Device Class L3="Rectifier Diodes", Digikey Description="DIODE GEN PURP 100V 150MA SOD123", Footprint Url=https://www.diodes.com/assets/Package-Files/SOD123.pdf, Height=1.45mm, Lead Free=Yes, Manufacturer Part Number=1N4148W-13-F, Mouser Description="1N4148W Series 2 A 100 V 400 mW Surface Mount Fast Switching Diode - SOD-123", Octopart=https://octopart.com/1n4148w-13-f-diodes+inc.-2359612, Reverse Voltage=100V, RoHS=TRUE, Standoff Height=0mm, Temperature Range High=+150°C
D11 D15: library part LED_0603_RED, "LED SMD 0603 RED 28.5-72mcd 100° WATER CLEAR"
D13: library part CMP-02540-000085-1, "DIODE GEN PURP 600V 3A DO201AD"
D14: "DIODE SIL.CARB.SCHOTTKY 30A 650V TO247F-2L THT"
F1: library part CMP-1502-00237-2, "FUSE HOLDER 5x20 TK79 PLASTIC", Fuse Current=10A, Voltage Rating (AC)=250V, Mount="Through Hole", NexarPartId=56808807, packaging=Box, REACH SVHC=Unknown, RoHS=Non-Compliant
J1: "PCB terminal blocks,Rated current: 65A,Rated voltage （III/2）1000V,Cross section:2.5-16mm²,pitch:10.16mm,connector method:Screw connector with tension sleeve,Color:green,Contact surface :Tin"
J2: "TERM.BLK.7.62MM 3P BARRIER TERMINAL BLACK"
K1: "RELAY POWER 16A 12V 1FormC 5PIN", Manufacturer_Name=Omron, Copyright="Copyright (C) 2025 Ultra Librarian. All rights reserved.", Manufacturer_Part_Number=G5LE-1-E-DC12, RefDes=RefDes, Type=Type
L1: library part CMP-03913-61645236-2, "POWER INDUCTOR General Purpose Inductor, 1000uH, 10%, 1 Element, SMD, 2424", Ambient Temperature Range High=85°C, Ambient Temperature Range Low=-40°C, Case/Package=Nonstandard, Current Rating=300mA, DC Resistance (DCR)=4.783Ω, Max Operating Temperature=125°C, Saturation Current=365mA, Self Resonant Frequency=1.86MHz, Test Frequency=100kHz, Tolerance=20%, Inductance=1mH, Composition=Wirewound, Height=4.5mm, Height - Seated (Max)=4.4958mm, Length=6mm, Min Operating Temperature=-40°C, Mount="Surface Mount", packaging="Tape & Reel (TR)", RoHS=Compliant, Shielding=Shielded, Width=6mm, Inductance Tolerance=20%
L2: library part CMP-0227-00499-2, "INDUCTOR POWER 1mH 7.8X7.0X5.0MM SMD", Ambient Temperature Range High=85°C, Ambient Temperature Range Low=-40°C, Case/Package=Nonstandard, DC Resistance (DCR)="3.3 Ohm", Max Operating Temperature=125°C, RMS Current (Irms)=380mA, Saturation Current=N/A, Test Frequency=10kHz, Tolerance=10%, Inductance=1mH, Inductance Tolerance=20%, Composition=Wirewound, Core Material=Ferrite, Height=5.4mm, Height - Seated (Max)=5.8928mm, Lead Free="Lead Free", Length=9mm, Min Operating Temperature=-40°C, Mount="Surface Mount", packaging=Digi-Reel®, REACH SVHC=Unknown, RoHS=Compliant, Shielding=Unshielded, Termination=SMD/SMT, Width=10mm
L3: "Coated Kool Mu Ferrite Core Toroid Type Length Width 1.875\" (47.63mm) Diameter 0.745\" (18.92mm) Height"
PTH1 PTH2 PTH3 PTH4 PTH5: library part PTH_S1
Q1: library part MOSFET_P_CHANNEL, "P-Channel 60 V 3A (Ta) 2.2W (Ta) Surface Mount SOT-223-3"
Q2: library part 2N7002, "N-Channel 60 V 300mA (Ta) 350mW (Ta) Surface Mount SOT-23-3 (TO-236)"
Q3: library part CMP-2000-06736-1, "PNP Small Signal Transisitor, 500 mA, 300 mW, -55 to 150 degC, 3-Pin SOT23, RoHS, Tape and Reel", Collector- Base Voltage VCBO=-300V, Collector-Emitter Saturation Voltage=-0.5V, Continuous Collector Current=-0.2A, Emitter- Base Voltage VEBO=-5V, manufacturer=DiodesIncorporated, Maximum DC Collector Current=0.5A, Maximum Operating Temperature=+150C, Minimum Operating Temperature=-55C, Package / Case=SOT-23, Package Description="3-Pin Small Outline Transistor, Body 2.9 x 1.3 mm, Pitch 0.96 mm", Package Reference=SOT23-3, Pd - Power Dissipation=300mW, Brand=DiodesIncorporated, Collector- Emitter Voltage VCEO Max=-300V, Configuration=Single, Datasheet URL=http://www.diodes.com/_files/datasheets/ds30060.pdf, Datasheet Version="Rev. 12-2, 05/2015", DC Collector/Base Gain hfe Min=40, Factory Pack Quantity=3000, Gain Bandwidth Product fT=50MHz, Height=1mm, Length=3.05mm, Manufacturer URL=http://www.diodes.com/, Mounting Style=SMD/SMT, Mounting Technology=SurfaceMount, packaging=Reel, Product Category=BipolarTransistors-BJT, RoHS=True, series=MMBTA92, Transistor Polarity=PNP, Unit Weight=0.000282oz, Width=1.4mm
Q5: library part Mosfet_TO220, "MOSFET DIS.17A 650V N-CH TO220-3"
R1 R15: library part RES, "RES.(1608) 0603 680K Ohms 1% 1/10W 100PPM,", Power Dissipation=0.1W
R2: library part RES, "RES.(1608) 0603 330K Ohms 5% 1/10W 100PPM SMT,", Power Dissipation=0.1W
R3: library part CMP-10618-000016-1, "VARISTOR 470V 4.5KA DISC 14MM", Capacitance=300pF, Clamping Current=50A, Clamping Voltage=775V, Max Operating Temperature=85°C, Max Surge Current=4.5kA, Max Voltage Rating (AC)=300V, Max Voltage Rating (DC)=385V, Min Operating Temperature=-40°C, Package Quantity=500, Tolerance=10%, Varistor Voltage=470V, Depth=5.2mm, Diameter=14mm, Energy=76J, Lead Length=30mm, Lead Pitch=7.5mm, Lead/Base Style=Radial, Mount=Radial, packaging=Bulk, REACH SVHC="No SVHC", RoHS Compliant=Yes, series=StandardD, Thickness=5.2mm, Voltage Rating (AC)=300V, Voltage Rating (DC)=385V, Voltage Tolerance=10%, Weight=0.141096oz
R4 R16: library part RES, "RES.(1608) 0603 1M Ohms 5% 1/10W 200PPM,", Power Dissipation=0.1W
R5: library part CMP-06022-000524-1, "THERMISTOR PTC 10R 270VAC", Resistance=10R
R6: library part RES, "RES.(1608) 0603 220 Ohms 1% 1/10W-S 100PPM"
R7: library part CSS2H-2512, "18 mOhms ±1% 2W Chip Resistor 2512 (6332 Metric) Automotive AEC-Q200, Current Sense Metal Film", manufacturer=YAGEO, Manufacturer Part Number=PE2512FKE7W0R018L
R8 R9: library part RES, "RES.(1608) 0603 120 Ohms 5% 1/10W-S 100PPM"
R10 R12 R20: library part RES, "RES.(1608) 0603 10K Ohms 5% 1/10W 100PPM SMT"
R11: library part RES, "RES.(1608) 0603 47.5K Ohms 1% 1/10W-S 100PPM"
R13 R14 R31: library part RES, "RES.(1608) 0603 4.7K Ohms 1% 1/10W-S 100PPM"
R17 R19: library part RES, "RES.(1608) 0603 330K Ohms 5% 1/10W-S 100PPM"
R18: library part RES, "RES.(1608) 0603 3.3K Ohms 1% 1/10W AUTOMOTIV"
R21 R22 R26 R27: library part RES, "0.1W, 1/10W Chip Resistor 0603 (1608 Metric)"
R23 R25 R28: library part RES, "RES.(1608) 0603 10 Ohms 5% 1/10W-S 400PPM"
R24: library part RES, "RES.(1608) 0603 6.8 Ohms 5% 1/10W-S 400PPM"
R29: library part RES, "RES.(1608) 0603 16.2K Ohms 1% 1/10W-S 100PPM"
R30 R32: library part RES, "RES.(1608) 0603 2K Ohms 1% 1/5W"
R33 R34 R35: library part RES, "RES.(1608) 0603 1M Ohms 5% 1/10W-S 100PPM"
R36: library part RES, "RES.(1608) 0603 12.7K Ohms 1% 1/4W 100PPM"
TP1 TP2 TP3 TP4: library part TEST_POINT_RND_1MM, "Test Point Round 1mm (NO BOM)"
TP5: library part CMP-1672-00002-4, "Test Point, Red, Through Hole, RoHS, Bulk", Colour=Red, manufacturer=Keystone, Package Quantity=100, componentlink1description="Manufacturer URL", componentlink1url=http://www.keyelco.com/, componentlink2description=Datasheet, componentlink2url=http://www.keyelco.com/product-pdf.cfm?p=1319, Contact Material=Bronze, Contact Plating=Silver, DatasheetVersion="Rev. F, 12/2013", Height="8.12 mm", Mount="Through Hole", Mounting Technology="Through Hole", PackageDescription="1-Pin Through Hole Device, Dia 3.17 mm", PackageReference=5010, packaging=Bulk, Pins=1, REACH SVHC="No SVHC", RoHSCompliant=true
U1: library part CMP-04918-000038-1, "IC PFC CTRLR AVERAGE CURR 8SOIC", manufacturer="Texas Instruments", Max Junction Temp=+125°C, Max Supply Voltage=21V, Nominal Supply Current=7mA, Output Current=40uA, Output Voltage=390mV, Package=D0008A, Switching Frequency=65kHz, Temperature="-40°C to +125°C", Temperature Range Low=-40°C, Automotive=No, Category=IC, componentlink2description=Datasheet, componentlink2url=http://www.ti.com/lit/ds/symlink/ucc28180.pdf, Device Class L1="Integrated Circuits (ICs)", Device Class L2="Power Management ICs", Device Class L3="Voltage Regulators - Switching", Digikey Description="IC PFC CTRLR AVERAGE CURR 8SOIC", Height=1.75mm, Lead Free=Yes, Manufacturer Part Number=UCC28180D, Max Duty Cycle=98%, Mouser Description="Power Factor Correction - PFC 8-PIN CCM PFC CONTROLLER", Number of Outputs=1, Octopart=https://octopart.com/ucc28180d-texas+instruments-31566950, Output Type=Fixed, RoHS=TRUE, Standoff Height=0.11mm, Switching Topology=Buck, Temperature Range High=+125°C, Ipc Land Pattern Name=SOIC127P600X175-8
U2: "Dual Low-Side Gate Driver IC Non-Inverting 8-HVSSOP", Package=None, Availability=Unavailable, MF="{'manufacturer': u'Texas Instruments'}", MP=UCC27424DGNR, Price=None
U3: library part CMP-2000-06569-1, "Lowest Component Count, Energy-Efficient Off-Line Switcher IC, 85 to 265 V, 220 uA, -40 to 150 degC, 7-Pin SMD, RoHS, Tube", manufacturer="Power Integrations", Package=SMD-8B(7-PIN), Package Description="7-Pin Surface Mount Device, Body 9.575 x 6.35 mm", Package Reference=SMD-8B-7, Input voltage=85...265VAC, Datasheet URL=http://www.mouser.com/ds/2/328/lnk302_304-306-179954.pdf, Datasheet Version="Rev. J, 06/2013", Function=Regulator, Manufacturer URL=https://www.power.com/, Mounting Technology=SurfaceMount, Output Type=Adjustable, Topology=Flyback
Z1 Z3: library part ZENER-1, "DIODE ZENER 500mW 18V ±5% SOD123 SMT"
Z2: library part ZENER-1, "Zener Diode 5.1 V 300 mW ±6% Surface Mount SOD-523"
Z4: "Zener Diode 18 V 200 mW ±5% Surface Mount SOD-323", Manufacturer_Name="Diodes Inc", Copyright="Copyright (C) 2026 Ultra Librarian. All rights reserved.", Manufacturer_Part_Number=MMSZ5248BS-7-F, Type=18V

## Via types
v1: diameter 0.6, hole 0.3, Top Layer to Bottom Layer, 112 vias
v2: diameter 1, hole 0.4, Top Layer to Bottom Layer, 40 vias

## Nets (pads, with @x,y where several pads share a name; then routed paths per layer and width w, separated by ;. In a path a pad name is that pad's centre, name@x,y a point inside that pad or via, vN(x,y) a via of type N, cw(c..) or ccw(c..) an arc to the next point about the centre after c; other vN are vias at no path point)
15V: C4.2 C5.2 C10.1 C12.2 C13.2 C17.2 D8.2 L1.2 Q1.2 Q1.3 Q1.4 R8.1 R12.1 R13.1 R21.1 R22.1 R31.1 R32.1 TP4.1 U1.7 U2.6 Z1.2 Z4.1 | length 423
  Top Layer w0.3: v1@81.5,62 v1(81.587,61.913) 81.675,61.825 U2.6@84.35,61.825
  Top Layer w0.5: v1(82.5,64) C13.2@83.8,64 83.8,65.943 C12.2@83.857,66 ; v1(84,55.75) R21.1@84,56.65 ; v1(88.5,55.75) R22.1@88.5,56.65 R13.1@90,56.65
  Top Layer w0.9: TP4.1@24,16.5 L1.2@24,14.8 L1.2@25.3,14.8 ; v1(25.75,16.5) 25.75,15.25 L1.2@25.3,14.8 ; C17.2@28.45,4.5 28.7,4.5 29.4,5.2 29.4,13.85 28.45,14.8 L1.2@25.3,14.8
  Bottom Layer w0.5: R8.1@8.15,56 5.836,56 5.25,55.414 5.25,44.5 7,42.75 24.5,42.75 29.5,47.75 58.25,47.75 63,52.5 63,71.25 65.75,74 74.207,74 74.5,74.293 Z1.2@74.5,75.5 74.5,77.357 C4.2@74.643,77.5 74.496,77.646 74.496,79.354 C5.2@74.35,79.5 74.35,82.35 74.865,82.865 U1.7@76.2,82.865 81.615,82.865
  Bottom Layer w0.7: D8.2@28,16.075 30.72,16.075 Z4.1@31,15.795 ; R31.1@31,17.65 Z4.1@31,15.795 ; 81.615,82.865 83,84.25 83,92.5 85.25,94.75 92.25,94.75 98.5,88.5 98.5,82.5 97.713,81.713 96.32,81.713 96.107,81.5 Q1.2@93.3,81.5 Q1.4@86.7,81.5 84.25,81.5 ; R12.1@87.65,87 85.5,87 84.25,85.75 84.25,81.5 ; Z4.1@31,15.795 Z4.1@31,15.77 31,15.745 31.125,15.62 31.68,15.62 31.95,15.35 R32.1@33.5,15.35 38.65,15.35 43.75,10.25 94,10.25 98.75,15 98.75,51 93.3,56.45 Q1.3@93.3,79.2 90.4,79.2 88.95,77.75 84.66,77.75 84.25,78.16 84.25,81.5
  Bottom Layer w0.8: v1(81.587,61.913) 81.587,63.087 v1(82.5,64) 84,64 ; 81.615,82.865 81.615,77.385 82.75,76.25 88.5,76.25 91,73.75 91,65.25 89.75,64 84,64 ; v1(88.5,55.75) 88.5,53.75 88,53.25 85.25,53.25 84,54.5 84,64
  Bottom Layer w0.9: v1(25.75,16.5) 26,16.75 27.325,16.75 27.975,16.1 27.975,16.075 D8.2@28,16.075
EARTH: J2.3 PTH4.1 | length 8.8
  Top Layer w0.5: PTH4.1@3.719,96.048 PTH4.1@3.937,96.266
  Top Layer w2: J2.3@3.5,87.75 3.5,93.529 v2(3.937,93.966) ; PTH4.1@3.719,93.966 PTH4.1@3.719,96.048
  other v2: 2.311,94.64 5.563,94.64 1.637,96.266 6.237,96.266 2.311,97.892 5.563,97.892 3.937,98.566